# EAGLE board sensor adc 8 (EAGLE 5.06)
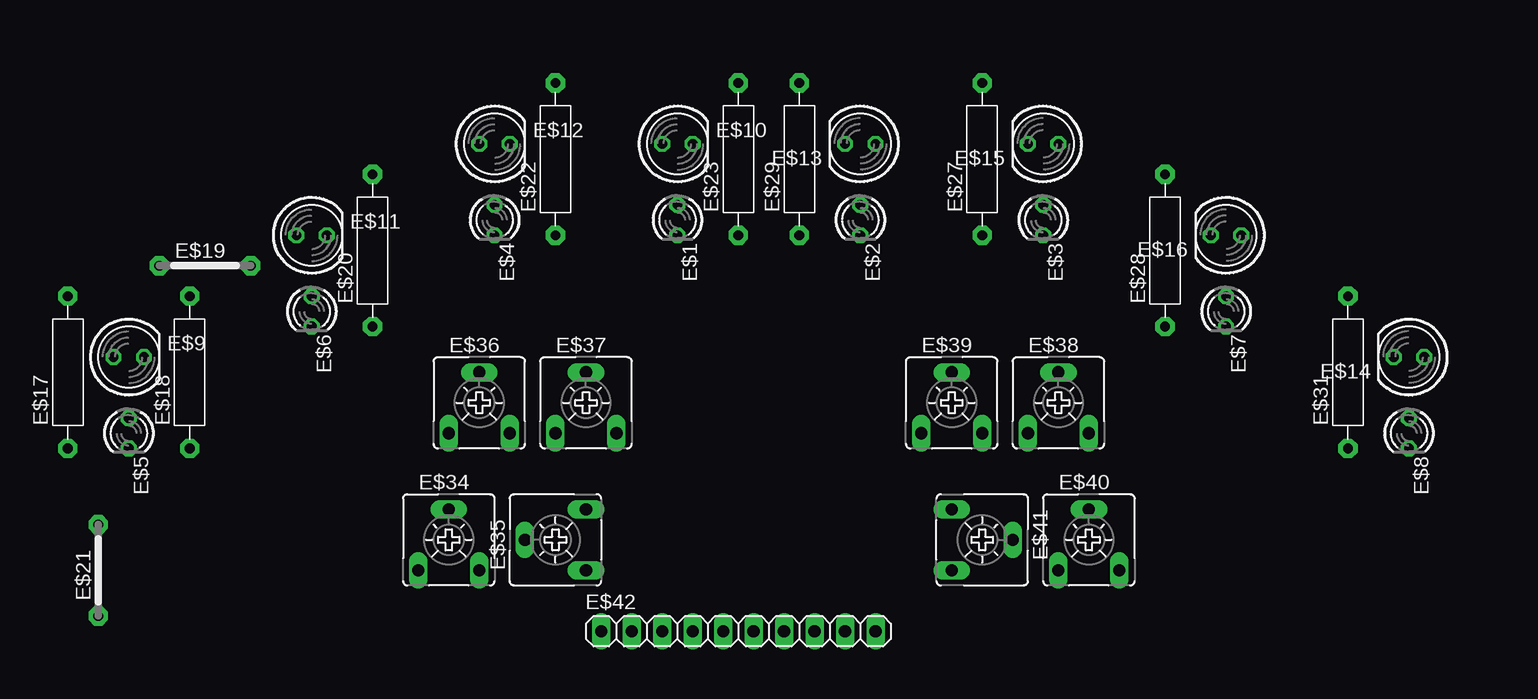
[diagram p0: board, top side]
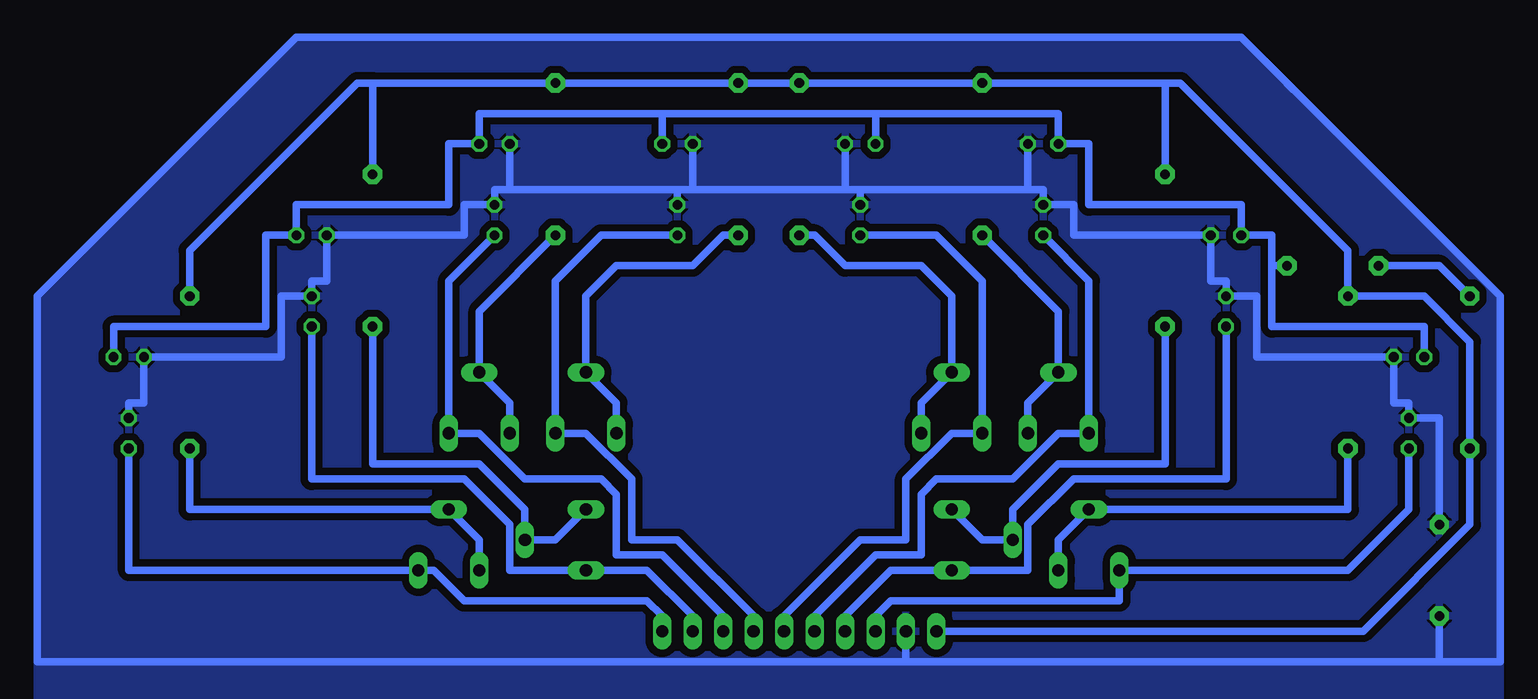
[diagram p1: board, bottom side, seen from below]

No outline drawn. Coordinates in mm, seen from the top.
Copper layers (1*16): Top 0.035mm / dielectric 1.5mm / Bottom 0.035mm
Design rules "default": minimum track width 10mil, minimum drill 24mil, track to track 8mil, track to pad 8mil, pad to pad 8mil, via to via 8mil, smd to smd 8mil, copper to edge 40mil, drill to drill 8mil, minimum pad ring 10mil, minimum via ring 8mil, stop-mask expansion 4mil, vias tented up to drill 0mil, thermal gap 10mil

## Footprints (pad centres in the part's own frame; a part is rotated, then mirrored left to right if it is on the bottom)
LED3MM = drill 0.813 octagon: A -1.27,0; K 1.27,0
LED5MM = drill 0.813 octagon: A -1.27,0; K 1.27,0
R-12,5 = drill 0.813 pad 1.6 octagon: 1 -6.35,0; 2 6.35,0
07 = drill 0.813 pad 1.6 octagon: 1 -3.81,0; 2 3.81,0
CA6V = drill 1.016 long: A -2.54,-2.54; E 2.54,-2.54; S 0,2.54
1X10 = drill 1.016 long: 1 -11.43,0; 2 -8.89,0; 3 -6.35,0; 4 -3.81,0; 5 -1.27,0; 6 1.27,0; 7 3.81,0; 8 6.35,0; 9 8.89,0; 10 11.43,0

## Placement (x,y rotation side)
E$1  [LED3MM]  60.96,35.56 270 top
E$2  [LED3MM]  76.2,35.56 270 top
E$3  [LED3MM]  91.44,35.56 270 top
E$4  [LED3MM]  45.72,35.56 270 top
E$5  [LED3MM]  15.24,17.78 270 top
E$6  [LED3MM]  30.48,27.94 270 top
E$7  [LED3MM]  106.68,27.94 270 top
E$8  [LED3MM]  121.92,17.78 270 top
E$9  [LED5MM]  15.24,24.13 0 top
E$10  [LED5MM]  60.96,41.91 0 top
E$11  [LED5MM]  30.48,34.29 0 top
E$12  [LED5MM]  45.72,41.91 0 top
E$13  [LED5MM]  76.2,41.91 180 top
E$14  [LED5MM]  121.92,24.13 180 top
E$15  [LED5MM]  91.44,41.91 180 top
E$16  [LED5MM]  106.68,34.29 180 top
E$17  [R-12,5]  10.16,22.86 90 top
E$18  [R-12,5]  20.32,22.86 90 top
E$19  [07]  21.59,31.75 0 top
E$20  [R-12,5]  35.56,33.02 90 top
E$21  [07]  12.7,6.35 90 top
E$22  [R-12,5]  50.8,40.64 90 top
E$23  [R-12,5]  66.04,40.64 90 top
E$27  [R-12,5]  86.36,40.64 90 top
E$28  [R-12,5]  101.6,33.02 90 top
E$29  [R-12,5]  71.12,40.64 90 top
E$31  [R-12,5]  116.84,22.86 90 top
E$34  [CA6V]  41.91,8.89 0 top
E$35  [CA6V]  50.8,8.89 90 top
E$36  [CA6V]  44.45,20.32 0 top
E$37  [CA6V]  53.34,20.32 0 top
E$38  [CA6V]  92.71,20.32 0 top
E$39  [CA6V]  83.82,20.32 0 top
E$40  [CA6V]  95.25,8.89 0 top
E$41  [CA6V]  86.36,8.89 270 top
E$42  [1X10]  66.04,1.27 0 top

## Library data of the parts
E$1-E$16 = led
E$17 E$18 E$20 E$22 E$23 E$27-E$29 E$31 = discrete
E$19 E$21 = jumper
E$34-E$41 = pot
E$42 = pinhead

## Nets
S$1: E$5.K E$34.A E$42.3
S$2: E$18.1 E$34.E E$34.S
S$3: E$6.K E$35.A
S$4: E$20.1 E$35.E E$35.S
S$5: E$22.1 E$36.E E$36.S
S$6: E$4.K E$36.A
S$7: E$1.K E$37.A
S$8: E$23.1 E$37.E E$37.S
S$9: E$29.1 E$39.A E$39.S
S$10: E$2.K E$39.E
S$11: E$7.K E$41.E E$42.9
S$12: E$3.K E$38.E E$42.8
S$13: E$8.K E$40.E E$42.10
S$15: E$17.1 E$18.2 E$20.2 E$22.2 E$23.2 E$27.2 E$28.2 E$29.2 E$31.2 E$42.1
S$17: E$27.1 E$38.A E$38.S
S$18: E$28.1 E$41.A E$41.S
S$19: E$31.1 E$40.A E$40.S
S$20: E$1.A E$2.A E$3.A E$4.A E$5.A E$6.A E$7.A E$8.A E$9.K E$10.K E$11.K E$12.K E$13.K E$14.K E$15.K E$16.K E$21.1 E$21.2 E$42.2
S$28: E$17.2
S$29: E$9.A E$10.A E$11.A E$12.A E$13.A E$14.A E$15.A E$16.A E$19.2

## Tracks (layer width: path | path; a pad name or v marks a point on that pad's centre or on a via)
S$1
  Bottom 0.61: E$5.K 15.24,11.43 20.32,6.35 E$34.A 39.37,3.81 58.42,3.81 59.69,2.54 E$42.3
S$2
  Bottom 0.61: E$18.1 20.32,11.43 E$34.S 44.45,8.89 E$34.E
S$3
  Bottom 0.61: E$6.K 30.48,13.97 43.18,13.97 46.99,10.16 46.99,6.35 E$35.A 58.42,6.35 62.23,2.54 62.23,1.27
S$4
  Bottom 0.61: E$20.1 35.56,15.24 44.45,15.24 48.26,11.43 E$35.S 50.8,8.89 E$35.E
S$5
  Bottom 0.61: E$22.1 44.45,27.94 E$36.S 46.99,20.32 E$36.E
S$6
  Bottom 0.61: E$4.K 41.91,30.48 E$36.A 44.45,17.78 48.26,13.97 54.61,13.97 55.88,12.7 55.88,7.62 59.69,7.62 64.77,2.54 64.77,1.27
S$7
  Bottom 0.61: E$1.K 54.61,34.29 50.8,30.48 E$37.A 53.34,17.78 57.15,13.97 57.15,8.89 60.96,8.89 67.31,2.54 67.31,1.27
S$8
  Bottom 0.61: E$23.1 64.77,34.29 62.23,31.75 55.88,31.75 53.34,29.21 E$37.S 55.88,20.32 E$37.E
S$9
  Bottom 0.61: E$29.1 72.39,34.29 74.93,31.75 81.28,31.75 83.82,29.21 E$39.S 81.28,20.32 E$39.A
S$10
  Bottom 0.61: E$2.K 82.55,34.29 86.36,30.48 E$39.E 83.82,17.78 80.01,13.97 80.01,8.89 76.2,8.89 69.85,2.54 69.85,1.27
S$11
  Bottom 0.61: E$42.9 74.93,2.54 78.74,6.35 E$41.E 90.17,6.35 90.17,10.16 93.98,13.97 106.68,13.97 E$7.K
S$12
  Bottom 0.61: E$3.K 95.25,30.48 E$38.E 92.71,17.78 88.9,13.97 82.55,13.97 81.28,12.7 81.28,7.62 77.47,7.62 72.39,2.54 E$42.8
S$13
  Bottom 0.61: E$8.K 121.92,6.35 E$40.E 96.52,6.35 93.98,3.81 78.74,3.81 77.47,2.54 E$42.10
S$15
  Bottom 0.61: E$42.1 19.05,1.27 10.16,10.16 E$17.1 10.16,25.4 13.97,29.21 E$18.2 20.32,33.02 34.29,46.99 35.56,46.99 | 101.6,46.99 102.87,46.99 116.84,33.02 E$31.2 | E$28.2 101.6,46.99 | 101.6,46.99 E$27.2 E$29.2 E$23.2 E$22.2 35.56,46.99 | E$20.2 35.56,46.99
S$17
  Bottom 0.61: E$38.A 90.17,20.32 E$38.S 92.71,27.94 E$27.1
S$18
  Bottom 0.61: E$41.A 86.36,8.89 E$41.S 88.9,11.43 92.71,15.24 101.6,15.24 E$28.1
S$19
  Bottom 0.61: E$40.A 92.71,8.89 E$40.S 116.84,11.43 E$31.1
S$20
  Bottom 0.61: 46.99,38.1 E$12.K | 46.99,38.1 45.72,38.1 E$4.A 43.18,36.83 43.18,34.29 E$11.K 31.75,30.48 30.48,30.48 E$6.A 27.94,29.21 27.94,24.13 E$9.K 16.51,20.32 15.24,20.32 E$5.A 12.7,19.05 E$21.2 | E$10.K 62.23,38.1 60.96,38.1 | 60.96,38.1 E$1.A | 46.99,38.1 60.96,38.1 | 74.93,38.1 E$13.K | 74.93,38.1 76.2,38.1 E$2.A | 60.96,38.1 74.93,38.1 | E$15.K 90.17,38.1 91.44,38.1 | 74.93,38.1 91.44,38.1 | 91.44,38.1 E$3.A 93.98,36.83 93.98,34.29 E$16.K 105.41,30.48 106.68,30.48 E$7.A 109.22,29.21 109.22,24.13 E$14.K 120.65,20.32 121.92,20.32 E$8.A | 12.7,-1.27 E$21.1 | 12.7,-1.27 57.15,-1.27 | 57.15,-1.27 E$42.2 | 57.15,-1.27 129.54,-1.27 129.54,29.21 107.95,50.8 29.21,50.8 24.13,45.72 | 12.7,-1.27 7.62,-1.27 7.62,29.21 24.13,45.72 | 24.13,45.72 25.4,46.99
  pour Bottom (isolate 0.61): 7.62,-12.7 129.54,-12.7 129.54,29.21 107.95,50.8 29.21,50.8 7.62,29.21
S$28
  Bottom 0.61: E$17.2 12.7,31.75 17.78,31.75
S$29
  Bottom 0.61: E$14.A 123.19,26.67 110.49,26.67 110.49,34.29 E$16.A 107.95,36.83 95.25,36.83 95.25,41.91 E$15.A 92.71,44.45 77.47,44.45 | 77.47,44.45 E$13.A | 59.69,44.45 E$10.A | 59.69,44.45 77.47,44.45 | 59.69,44.45 44.45,44.45 E$12.A 41.91,41.91 41.91,36.83 29.21,36.83 E$11.A 26.67,34.29 26.67,31.75 | 26.67,31.75 E$19.2 | 26.67,31.75 26.67,26.67 13.97,26.67 E$9.A